# Altium PCB COMMS_ECU_revA.PcbDoc (part 6 of 6)
Units mm, origin at the board's own origin, x right, y up, seen from the top; angles counter-clockwise.
Board outline 370 x 261 mm, 6 copper layers (Top Layer, Mid Layer 1, Mid Layer 2, Mid Layer 3, Mid Layer 4, Bottom Layer), stack 1.538 mm thick; 739 components, 500 nets, 2454 pads, 325 vias.
Unrouted connection lines stored in the file: 1573.
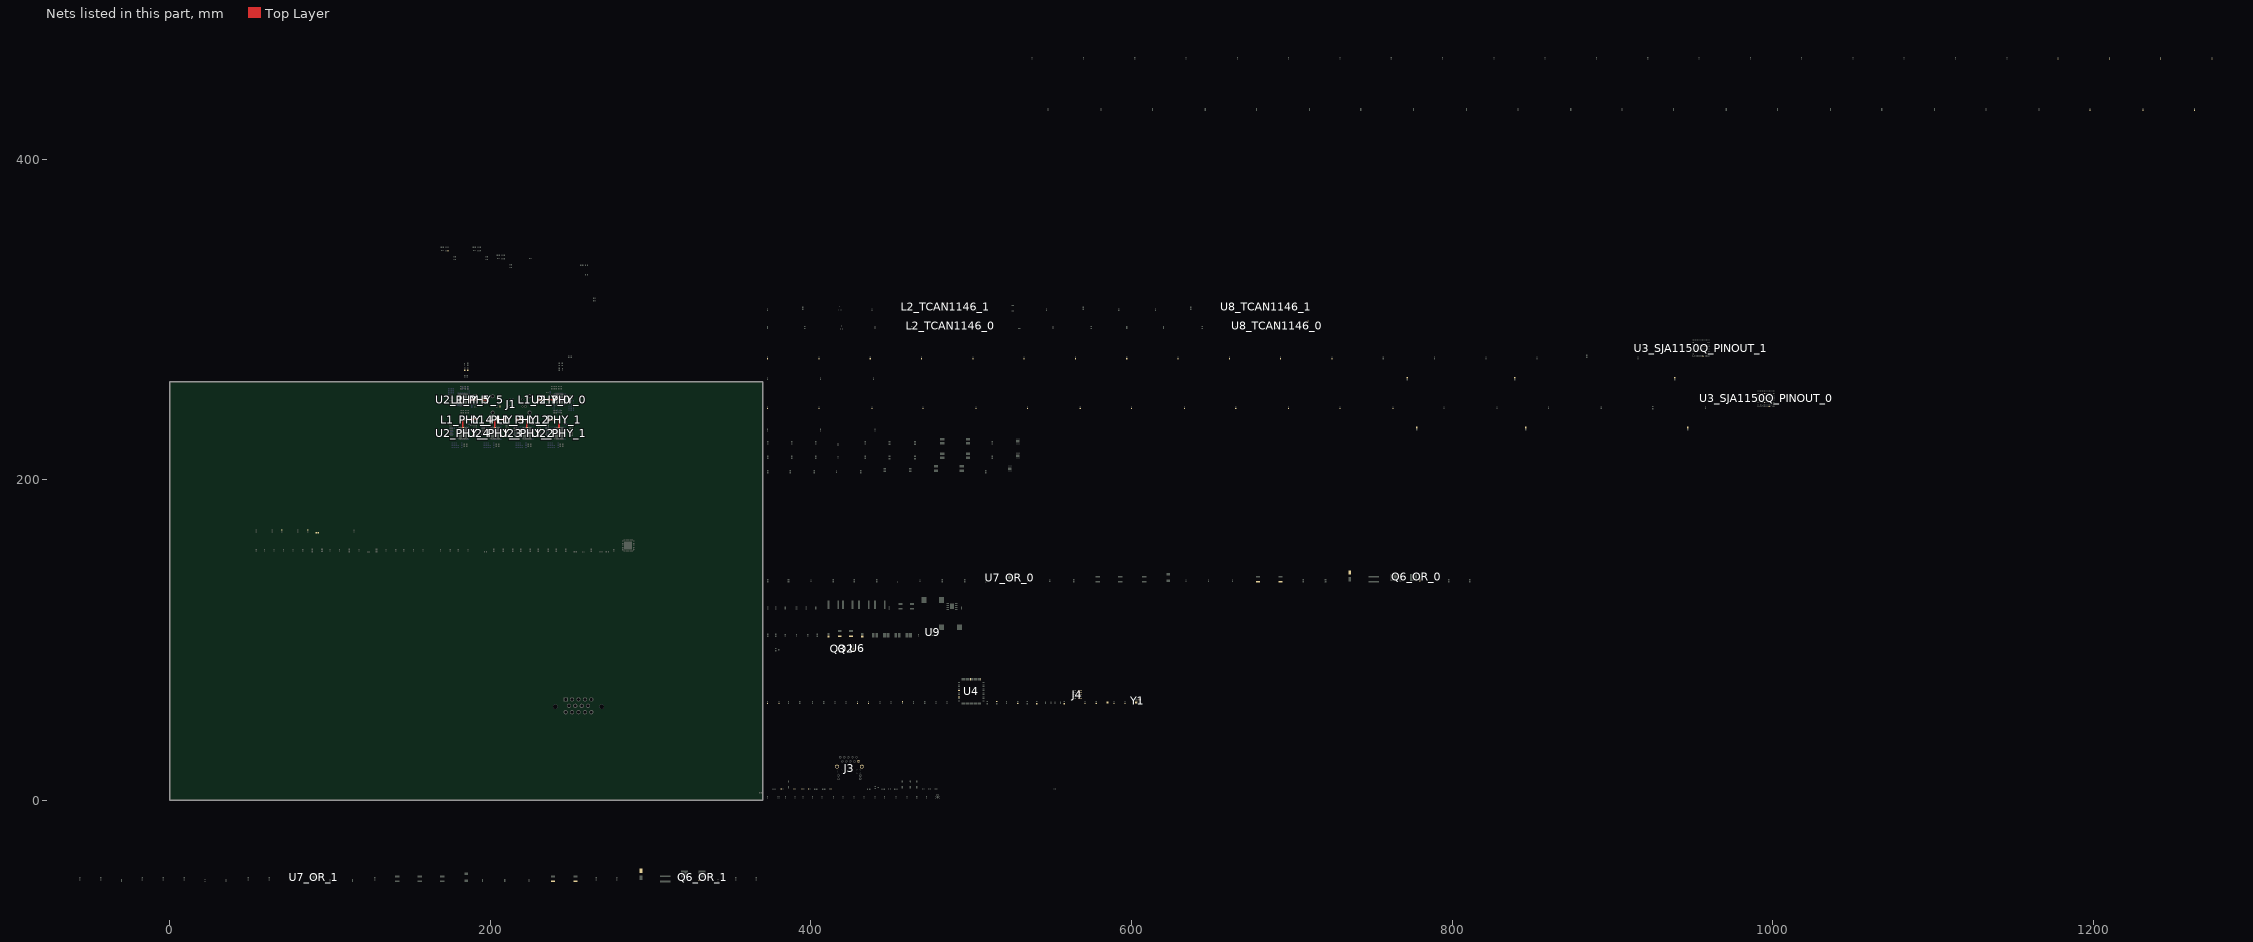
[diagram p5: the nets of this part, all layers, seen from the top]

## Via types
v1: diameter 0.5, hole 0.3, Top Layer to Bottom Layer, 319 vias
v2: diameter 0.66, hole 0.33, Top Layer to Bottom Layer, tented top, 6 vias

## Nets (pads, with @x,y where several pads share a name; then routed paths per layer and width w, separated by ;. In a path a pad name is that pad's centre, name@x,y a point inside that pad or via, vN(x,y) a via of type N, cw(c..) or ccw(c..) an arc to the next point about the centre after c; other vN are vias at no path point) (continued)
P4_TRX_P: C31_PHY_4.2 J1.3-1 R24_PHY_4.2 | length 2
  Top Layer w0.123: C31_PHY_4.2@190.229,238.25 190.25,238.25 190.525,237.975 190.525,237.734 190.597,237.662 191.489,237.662 191.703,237.875 v1(191.75,237.875)
P5_TRX_N: C32_PHY_5.2 J1.4-2 R23_PHY_5.2 | length 2
  Top Layer w0.123: C32_PHY_5.2@196.729,249.25 196.75,249.25 197.025,249.525 197.025,249.766 197.097,249.838 197.989,249.838 198.203,249.625 v1(198.25,249.625)
P5_TRX_P: C31_PHY_5.2 J1.4-1 R24_PHY_5.2 | length 2
  Top Layer w0.123: C31_PHY_5.2@196.729,250.75 196.75,250.75 197.025,250.475 197.025,250.234 197.097,250.162 197.989,250.162 198.203,250.375 v1(198.25,250.375)
PRE_CAN_TCAN1146_0_N: L2_TCAN1146_0.3 U8_TCAN1146_0.12
PRE_CAN_TCAN1146_0_P: L2_TCAN1146_0.2 U8_TCAN1146_0.13
PRE_CAN_TCAN1146_1_N: L2_TCAN1146_1.3 U8_TCAN1146_1.12
PRE_CAN_TCAN1146_1_P: L2_TCAN1146_1.2 U8_TCAN1146_1.13
PRE_VCC: C139_OR_0.2 C139_OR_1.2 C140_OR_0.1 C140_OR_1.1 C141_OR_0.1 C141_OR_1.1 D11_TCAN1146_0.2 D11_TCAN1146_1.2 Q2.1 Q2.2 Q2.3 Q3.1 Q3.2 Q3.3 Q6_OR_0.1-2-3 Q6_OR_1.1-2-3 R61.2 U7_OR_0.15 U7_OR_0.16 U7_OR_1.15 U7_OR_1.16
PWR_SW_GATE: Q2.4 Q3.4 R61.1 R64.2
RESETN: C115.1 J4.10 R48.1 R50.2 U4.14
RJ45_GND: C5.2 C6.1 C7.1 C8.1 C9.1 J3.P1 J3.S1 J3.S2
SW_VDD_CORE: C70_SJA1150Q_PINOUT_0.1 C70_SJA1150Q_PINOUT_1.1 C71_SJA1150Q_PINOUT_0.1 C71_SJA1150Q_PINOUT_1.1 C72_SJA1150Q_PINOUT_0.1 C72_SJA1150Q_PINOUT_1.1 C73_SJA1150Q_PINOUT_0.1 C73_SJA1150Q_PINOUT_1.1 C74_SJA1150Q_PINOUT_0.1 C74_SJA1150Q_PINOUT_1.1 C75_SJA1150Q_PINOUT_0.1 C75_SJA1150Q_PINOUT_1.1 C76_SJA1150Q_PINOUT_0.1 C76_SJA1150Q_PINOUT_1.1 C77_SJA1150Q_PINOUT_0.1 C77_SJA1150Q_PINOUT_1.1 C78_SJA1150Q_PINOUT_0.1 C78_SJA1150Q_PINOUT_1.1 C79_SJA1150Q_PINOUT_0.1 C79_SJA1150Q_PINOUT_1.1 FB13_SJA1150Q_PINOUT_0.2 FB13_SJA1150Q_PINOUT_1.2 U3_SJA1150Q_PINOUT_0.D6 U3_SJA1150Q_PINOUT_0.D9 U3_SJA1150Q_PINOUT_0.F4 U3_SJA1150Q_PINOUT_0.F11 U3_SJA1150Q_PINOUT_0.J4 U3_SJA1150Q_PINOUT_0.J11 U3_SJA1150Q_PINOUT_0.L6 U3_SJA1150Q_PINOUT_0.L9 U3_SJA1150Q_PINOUT_1.D6 U3_SJA1150Q_PINOUT_1.D9 U3_SJA1150Q_PINOUT_1.F4 U3_SJA1150Q_PINOUT_1.F11 U3_SJA1150Q_PINOUT_1.J4 U3_SJA1150Q_PINOUT_1.J11 U3_SJA1150Q_PINOUT_1.L6 U3_SJA1150Q_PINOUT_1.L9
SW_VDDA_OSC: C64_SJA1150Q_PINOUT_0.1 C64_SJA1150Q_PINOUT_1.1 C65_SJA1150Q_PINOUT_0.1 C65_SJA1150Q_PINOUT_1.1 C66_SJA1150Q_PINOUT_0.1 C66_SJA1150Q_PINOUT_1.1 FB16_SJA1150Q_PINOUT_0.2 FB16_SJA1150Q_PINOUT_1.2 U3_SJA1150Q_PINOUT_0.K1 U3_SJA1150Q_PINOUT_1.K1
SW_VDDA_PLL: C67_SJA1150Q_PINOUT_0.1 C67_SJA1150Q_PINOUT_1.1 C68_SJA1150Q_PINOUT_0.1 C68_SJA1150Q_PINOUT_1.1 C69_SJA1150Q_PINOUT_0.1 C69_SJA1150Q_PINOUT_1.1 FB19_SJA1150Q_PINOUT_0.2 FB19_SJA1150Q_PINOUT_1.2 U3_SJA1150Q_PINOUT_0.J1 U3_SJA1150Q_PINOUT_1.J1
SWCLK: J4.4 R46.1 U4.76
SWDIO: J4.2 U4.72
SWO: J4.6 U4.89
TRX_PHY_0_N: L1_PHY_0.2 U2_PHY_0.42 | length 4.3
  Top Layer w0.123: L1_PHY_0.2@235.525,250.5 235.75,250.5 235.988,250.262 235.988,250.234 236.061,250.162 239.177,250.162 239.266,250.25 U2_PHY_0.42@239.6,250.25
TRX_PHY_0_P: L1_PHY_0.1 U2_PHY_0.43 | length 4.3
  Top Layer w0.123: L1_PHY_0.1@235.525,249.5 235.75,249.5 235.988,249.738 235.988,249.766 236.061,249.838 239.177,249.838 239.266,249.75 U2_PHY_0.43@239.6,249.75
TRX_PHY_1_N: L1_PHY_1.2 U2_PHY_1.42 | length 6.4
  Top Layer w0.123: L1_PHY_1.2@242.025,238 242.25,238 242.488,237.762 242.488,237.734 242.561,237.662 242.869,237.662 243.162,237.369 243.162,232.823 243.25,232.734 U2_PHY_1.42@243.25,232.4
TRX_PHY_1_P: L1_PHY_1.1 U2_PHY_1.43 | length 5.9
  Top Layer w0.123: L1_PHY_1.1@242.025,237 242.25,237 242.488,237.238 242.488,237.266 242.561,237.338 242.735,237.338 242.838,237.235 242.838,232.823 242.75,232.734 U2_PHY_1.43@242.75,232.4
TRX_PHY_2_N: L1_PHY_2.2 U2_PHY_2.42 | length 6.4
  Top Layer w0.123: L1_PHY_2.2@222.025,238 222.25,238 222.488,237.762 222.488,237.734 222.561,237.662 222.869,237.662 223.162,237.369 223.162,232.823 223.25,232.734 U2_PHY_2.42@223.25,232.4
TRX_PHY_2_P: L1_PHY_2.1 U2_PHY_2.43 | length 5.9
  Top Layer w0.123: L1_PHY_2.1@222.025,237 222.25,237 222.488,237.238 222.488,237.266 222.561,237.338 222.735,237.338 222.838,237.235 222.838,232.823 222.75,232.734 U2_PHY_2.43@222.75,232.4
TRX_PHY_3_N: L1_PHY_3.2 U2_PHY_3.42 | length 5.9
  Top Layer w0.123: U2_PHY_3.42@203.25,232.4 203.25,232.734 203.162,232.823 203.162,237.235 203.265,237.338 203.439,237.338 203.512,237.266 203.512,237.238 203.75,237 L1_PHY_3.2@203.975,237
TRX_PHY_3_P: L1_PHY_3.1 U2_PHY_3.43 | length 6.4
  Top Layer w0.123: U2_PHY_3.43@202.75,232.4 202.75,232.734 202.838,232.823 202.838,237.369 203.131,237.662 203.439,237.662 203.512,237.734 203.512,237.762 203.75,238 L1_PHY_3.1@203.975,238
TRX_PHY_4_N: L1_PHY_4.2 U2_PHY_4.42 | length 5.9
  Top Layer w0.123: U2_PHY_4.42@183.25,232.4 183.25,232.734 183.162,232.823 183.162,237.235 183.265,237.338 183.439,237.338 183.512,237.266 183.512,237.238 183.75,237 L1_PHY_4.2@183.975,237
TRX_PHY_4_P: L1_PHY_4.1 U2_PHY_4.43 | length 6.4
  Top Layer w0.123: U2_PHY_4.43@182.75,232.4 182.75,232.734 182.838,232.823 182.838,237.369 183.131,237.662 183.439,237.662 183.512,237.734 183.512,237.762 183.75,238 L1_PHY_4.1@183.975,238
TRX_PHY_5_N: L1_PHY_5.2 U2_PHY_5.42 | length 4.3
  Top Layer w0.123: U2_PHY_5.42@186.4,249.75 186.734,249.75 186.823,249.838 189.939,249.838 190.012,249.766 190.012,249.738 190.25,249.5 L1_PHY_5.2@190.475,249.5
TRX_PHY_5_P: L1_PHY_5.1 U2_PHY_5.43 | length 4.3
  Top Layer w0.123: U2_PHY_5.43@186.4,250.25 186.734,250.25 186.823,250.162 189.939,250.162 190.012,250.234 190.012,250.262 190.25,250.5 L1_PHY_5.1@190.475,250.5
TRX_TERM_PHY_0_N: C32_PHY_0.1 L1_PHY_0.3 | length 2.8
  Top Layer w0.123: C32_PHY_0.1@230.229,250.75 230.479,250.5 230.479,250.234 230.551,250.162 231.449,250.162 231.939,250.162 232.012,250.234 232.012,250.262 232.25,250.5 L1_PHY_0.3@232.475,250.5
TRX_TERM_PHY_0_P: C31_PHY_0.1 L1_PHY_0.4 | length 2.8
  Top Layer w0.123: C31_PHY_0.1@230.229,249.25 230.479,249.5 230.479,249.766 230.551,249.838 231.315,249.838 231.939,249.838 232.012,249.766 232.012,249.738 232.25,249.5 L1_PHY_0.4@232.475,249.5
TRX_TERM_PHY_1_N: C32_PHY_1.1 L1_PHY_1.3 | length 2.8
  Top Layer w0.123: C32_PHY_1.1@236.729,238.25 236.979,238 236.979,237.734 237.051,237.662 238.439,237.662 238.512,237.734 238.512,237.762 238.75,238 L1_PHY_1.3@238.975,238
TRX_TERM_PHY_1_P: C31_PHY_1.1 L1_PHY_1.4 | length 2.8
  Top Layer w0.123: C31_PHY_1.1@236.729,236.75 236.979,237 236.979,237.266 237.051,237.338 238.439,237.338 238.512,237.266 238.512,237.238 238.75,237 L1_PHY_1.4@238.975,237
TRX_TERM_PHY_2_N: C32_PHY_2.1 L1_PHY_2.3 | length 2.8
  Top Layer w0.123: C32_PHY_2.1@216.729,238.25 216.979,238 216.979,237.734 217.051,237.662 218.439,237.662 218.512,237.734 218.512,237.762 218.75,238 L1_PHY_2.3@218.975,238
TRX_TERM_PHY_2_P: C31_PHY_2.1 L1_PHY_2.4 | length 2.8
  Top Layer w0.123: C31_PHY_2.1@216.729,236.75 216.979,237 216.979,237.266 217.051,237.338 218.439,237.338 218.512,237.266 218.512,237.238 218.75,237 L1_PHY_2.4@218.975,237
TRX_TERM_PHY_3_N: C32_PHY_3.1 L1_PHY_3.3 | length 2.8
  Top Layer w0.123: L1_PHY_3.3@207.025,237 207.25,237 207.488,237.238 207.488,237.266 207.561,237.338 208.949,237.338 209.021,237.266 209.021,237 C32_PHY_3.1@209.271,236.75
TRX_TERM_PHY_3_P: C31_PHY_3.1 L1_PHY_3.4 | length 2.8
  Top Layer w0.123: L1_PHY_3.4@207.025,238 207.25,238 207.488,237.762 207.488,237.734 207.561,237.662 208.949,237.662 209.021,237.734 209.021,238 C31_PHY_3.1@209.271,238.25
TRX_TERM_PHY_4_N: C32_PHY_4.1 L1_PHY_4.3 | length 2.8
  Top Layer w0.123: L1_PHY_4.3@187.025,237 187.25,237 187.488,237.238 187.488,237.266 187.561,237.338 188.949,237.338 189.021,237.266 189.021,237 C32_PHY_4.1@189.271,236.75
TRX_TERM_PHY_4_P: C31_PHY_4.1 L1_PHY_4.4 | length 2.8
  Top Layer w0.123: L1_PHY_4.4@187.025,238 187.25,238 187.488,237.762 187.488,237.734 187.561,237.662 188.949,237.662 189.021,237.734 189.021,238 C31_PHY_4.1@189.271,238.25
TRX_TERM_PHY_5_N: C32_PHY_5.1 L1_PHY_5.3 | length 2.8
  Top Layer w0.123: L1_PHY_5.3@193.525,249.5 193.75,249.5 193.988,249.738 193.988,249.766 194.061,249.838 194.551,249.838 195.449,249.838 195.521,249.766 195.521,249.5 C32_PHY_5.1@195.771,249.25
TRX_TERM_PHY_5_P: C31_PHY_5.1 L1_PHY_5.4 | length 2.8
  Top Layer w0.123: L1_PHY_5.4@193.525,250.5 193.75,250.5 193.988,250.262 193.988,250.234 194.061,250.162 194.685,250.162 195.449,250.162 195.521,250.234 195.521,250.5 C31_PHY_5.1@195.771,250.75
VCC: C164.1 C165.1 C166.1 C167.1 R62.2 U6.3 U6.4 U9.2 U9.13 U9.14
VDDA: C122.1 C123.1 C130.1 C131.1 FB23.2 U4.20 U4.21
X32_N: C113.1 U4.9 Y2.2
X32_P: C112.1 U4.8 Y2.1
X_N: C110.1 U4.13 Y1.1
X_P: C111.1 U4.12 Y1.3
pads on no net: D5.2 J2. J3. J4.7 J4.8 J4.9 U1.14 U1.42 U1.44 U1.45 U2_PHY_0.2 U2_PHY_0.7 U2_PHY_0.38 U2_PHY_0.40 U2_PHY_1.2 U2_PHY_1.7 U2_PHY_1.38 U2_PHY_1.40 U2_PHY_2.2 U2_PHY_2.7 U2_PHY_2.38 U2_PHY_2.40 U2_PHY_3.2 U2_PHY_3.7 U2_PHY_3.38 U2_PHY_3.40 U2_PHY_4.2 U2_PHY_4.7 U2_PHY_4.38 U2_PHY_4.40 U2_PHY_5.2 U2_PHY_5.7 U2_PHY_5.38 U2_PHY_5.40 U3_SJA1150Q_PINOUT_0.A3 U3_SJA1150Q_PINOUT_0.A10 U3_SJA1150Q_PINOUT_0.F14 U3_SJA1150Q_PINOUT_0.H1 U3_SJA1150Q_PINOUT_0.L1 U3_SJA1150Q_PINOUT_0.M1 U3_SJA1150Q_PINOUT_0.M2 U3_SJA1150Q_PINOUT_0.N1 U3_SJA1150Q_PINOUT_0.N3 U3_SJA1150Q_PINOUT_0.N14 U3_SJA1150Q_PINOUT_0.P2 U3_SJA1150Q_PINOUT_0.P6 U3_SJA1150Q_PINOUT_1.A3 U3_SJA1150Q_PINOUT_1.A10 U3_SJA1150Q_PINOUT_1.F14 U3_SJA1150Q_PINOUT_1.H1 U3_SJA1150Q_PINOUT_1.L1 U3_SJA1150Q_PINOUT_1.M1 U3_SJA1150Q_PINOUT_1.M2 U3_SJA1150Q_PINOUT_1.N1 U3_SJA1150Q_PINOUT_1.N3 U3_SJA1150Q_PINOUT_1.N14 U3_SJA1150Q_PINOUT_1.P2 U3_SJA1150Q_PINOUT_1.P6 U5.19 U6.6 U7_OR_0.8 U7_OR_0.17 U7_OR_0.21 U7_OR_0.25 U7_OR_1.8 U7_OR_1.17 U7_OR_1.21 U7_OR_1.25 U9.10 U10_REG_1.5 U10_REG_2.5 U10_REG_3.5
copper on no net: | length 2
  Top Layer w0.123: 210.229,236.75 210.25,236.75 210.525,237.025 210.525,237.266 210.597,237.338 211.489,237.338 211.703,237.125 v1(211.75,237.125)
  other v1: 191.75,236.375 211.75,236.375 214.25,236.375 234.25,236.375 191.75,238.625 211.75,238.625 214.25,238.625 234.25,238.625 198.25,248.875 227.75,248.875 198.25,251.125 227.75,251.125

## Polygon pours and split planes (outlines as drawn)
LAN8870_VDDA_PHY_2 on Top Layer "LAN8870_VDDA_PHY_2_L01_P073" (solid, remove dead copper, pour order 73): 220.5,232 220.5,232.75 220,233.25 220,234.25 219.5,234.25 219.5,232
3V3 on Top Layer "3V3_L01_P143" (solid, remove dead copper, pour order 143): 246,247 248.25,247 248.25,247.5 246,247.5
NetC36_PHY_0_1 on Top Layer "NETC36_PHY_0_1_L01_P131" (solid, remove dead copper, pour order 131): 243.75,247 243.75,244.75 244.5,244.75 244.5,247
NetC42_PHY_0_1 on Top Layer "NETC42_PHY_0_1_L01_P125" (solid, remove dead copper, pour order 125): 242,247 242,244.75 242.5,244.75 242.5,247
LAN8870_VBAT_PHY_0 on Top Layer "LAN8870_VBAT_PHY_0_L01_P119" (solid, remove dead copper, pour order 119): 240,247 240,244.75 240.5,244.75 240.5,247
3V3 on Top Layer "3V3_L01_P113" (solid, remove dead copper, pour order 113): 246,251.25 247.5,251.25 247.75,251.5 248.25,251.5 248.25,250.5 246,250.5
8870_1V1 on Top Layer "8870_1V1_L01_P107" (solid, remove dead copper, pour order 107): 248.25,252.25 246,252.25 246,252 246,251.5 248.25,251.5
8870_1V1 on Top Layer "8870_1V1_L01_P101" (solid, remove dead copper, pour order 101): 246,250 248.25,250 248.25,250.5 246,250.5
8870_1V1 on Top Layer "8870_1V1_L01_P095" (solid, remove dead copper, pour order 95): 244,253 244,255.25 243.5,255.25 243.5,253
3V3 on Top Layer "3V3_L01_P089" (solid, remove dead copper, pour order 89): 240.5,253 240.5,255.25 240,255.25 240,253
LAN8870_VDDA_PHY_0 on Top Layer "LAN8870_VDDA_PHY_0_L01_P083" (solid, remove dead copper, pour order 83): 240,253 237.75,253 237.75,252.5 240,252.5
LAN8870_VDDA_PHY_0 on Top Layer "LAN8870_VDDA_PHY_0_L01_P077" (solid, remove dead copper, pour order 77): 240,251 237.75,251 237.75,250.5 240,250.5
LAN8870_VDDA_PHY_0 on Top Layer "LAN8870_VDDA_PHY_0_L01_P071" (solid, remove dead copper, pour order 71): 240,247.5 239.25,247.5 238.75,247 237.75,247 237.75,246.5 240,246.5
NetC42_PHY_0_1 on Top Layer "NETC42_PHY_0_1_L01_P065" (solid, remove dead copper, pour order 65): 240,248.5 238.5,248.5 238.25,248.25 237.75,248.25 237.75,247.5 238.25,247.5 238.75,248 240,248
LAN8870_VDDA_PHY_0 on Top Layer "LAN8870_VDDA_PHY_0_L01_P059" (solid, remove dead copper, pour order 59): 240,249 237.75,249 237.75,248.25 238.25,248.25 238.5,248.5 240,248.5
NetC42_PHY_0_1 on Top Layer "NETC42_PHY_0_1_L01_P053" (solid, remove dead copper, pour order 53): 240,249.5 237.75,249.5 237.75,249 240,249
8870_1V1 on Top Layer "8870_1V1_L01_P137" (solid, remove dead copper, pour order 137): 245.25,247 245.25,244.75 244.5,244.75 244.5,247
NetC42_PHY_4_1 on Top Layer "NETC42_PHY_4_1_L01_P054" (solid, remove dead copper, pour order 54): 182.5,232 182.5,234.25 182,234.25 182,232
NetC42_PHY_3_1 on Top Layer "NETC42_PHY_3_1_L01_P054" (solid, remove dead copper, pour order 54): 202.5,232 202.5,234.25 202,234.25 202,232
NetC42_PHY_1_1 on Top Layer "NETC42_PHY_1_1_L01_P055" (solid, remove dead copper, pour order 55): 242.5,232 242.5,234.25 242,234.25 242,232
NetC42_PHY_2_1 on Top Layer "NETC42_PHY_2_1_L01_P055" (solid, remove dead copper, pour order 55): 222.5,232 222.5,234.25 222,234.25 222,232
LAN8870_VDDA_PHY_4 on Top Layer "LAN8870_VDDA_PHY_4_L01_P060" (solid, remove dead copper, pour order 60): 182,232 182,234.25 181.25,234.25 181.25,233.75 181.5,233.5 181.5,232
LAN8870_VDDA_PHY_3 on Top Layer "LAN8870_VDDA_PHY_3_L01_P060" (solid, remove dead copper, pour order 60): 202,232 202,234.25 201.25,234.25 201.25,233.75 201.5,233.5 201.5,232
LAN8870_VDDA_PHY_1 on Top Layer "LAN8870_VDDA_PHY_1_L01_P061" (solid, remove dead copper, pour order 61): 242,232 242,234.25 241.25,234.25 241.25,233.75 241.5,233.5 241.5,232
LAN8870_VDDA_PHY_2 on Top Layer "LAN8870_VDDA_PHY_2_L01_P061" (solid, remove dead copper, pour order 61): 222,232 222,234.25 221.25,234.25 221.25,233.75 221.5,233.5 221.5,232
NetC42_PHY_4_1 on Top Layer "NETC42_PHY_4_1_L01_P066" (solid, remove dead copper, pour order 66): 181.5,232 181.5,233.5 181.25,233.75 181.25,234.25 180.5,234.25 180.5,233.75 181,233.25 181,232
NetC42_PHY_3_1 on Top Layer "NETC42_PHY_3_1_L01_P066" (solid, remove dead copper, pour order 66): 201.5,232 201.5,233.5 201.25,233.75 201.25,234.25 200.5,234.25 200.5,233.75 201,233.25 201,232
NetC42_PHY_1_1 on Top Layer "NETC42_PHY_1_1_L01_P067" (solid, remove dead copper, pour order 67): 241.5,232 241.5,233.5 241.25,233.75 241.25,234.25 240.5,234.25 240.5,233.75 241,233.25 241,232
NetC42_PHY_2_1 on Top Layer "NETC42_PHY_2_1_L01_P067" (solid, remove dead copper, pour order 67): 221.5,232 221.5,233.5 221.25,233.75 221.25,234.25 220.5,234.25 220.5,233.75 221,233.25 221,232
LAN8870_VDDA_PHY_4 on Top Layer "LAN8870_VDDA_PHY_4_L01_P072" (solid, remove dead copper, pour order 72): 180.5,232 180.5,232.75 180,233.25 180,234.25 179.5,234.25 179.5,232
LAN8870_VDDA_PHY_3 on Top Layer "LAN8870_VDDA_PHY_3_L01_P072" (solid, remove dead copper, pour order 72): 200.5,232 200.5,232.75 200,233.25 200,234.25 199.5,234.25 199.5,232
LAN8870_VDDA_PHY_1 on Top Layer "LAN8870_VDDA_PHY_1_L01_P073" (solid, remove dead copper, pour order 73): 240.5,232 240.5,232.75 240,233.25 240,234.25 239.5,234.25 239.5,232
LAN8870_VDDA_PHY_3 on Top Layer "LAN8870_VDDA_PHY_3_L01_P078" (solid, remove dead copper, pour order 78): 204,232 204,234.25 203.5,234.25 203.5,232
LAN8870_VDDA_PHY_4 on Top Layer "LAN8870_VDDA_PHY_4_L01_P078" (solid, remove dead copper, pour order 78): 184,232 184,234.25 183.5,234.25 183.5,232
LAN8870_VDDA_PHY_1 on Top Layer "LAN8870_VDDA_PHY_1_L01_P079" (solid, remove dead copper, pour order 79): 244,232 244,234.25 243.5,234.25 243.5,232
LAN8870_VDDA_PHY_2 on Top Layer "LAN8870_VDDA_PHY_2_L01_P079" (solid, remove dead copper, pour order 79): 224,232 224,234.25 223.5,234.25 223.5,232
LAN8870_VDDA_PHY_4 on Top Layer "LAN8870_VDDA_PHY_4_L01_P084" (solid, remove dead copper, pour order 84): 186,232 186,234.25 185.5,234.25 185.5,232
LAN8870_VDDA_PHY_3 on Top Layer "LAN8870_VDDA_PHY_3_L01_P084" (solid, remove dead copper, pour order 84): 206,232 206,234.25 205.5,234.25 205.5,232
LAN8870_VDDA_PHY_2 on Top Layer "LAN8870_VDDA_PHY_2_L01_P085" (solid, remove dead copper, pour order 85): 226,232 226,234.25 225.5,234.25 225.5,232
LAN8870_VDDA_PHY_1 on Top Layer "LAN8870_VDDA_PHY_1_L01_P085" (solid, remove dead copper, pour order 85): 246,232 246,234.25 245.5,234.25 245.5,232
3V3 on Top Layer "3V3_L01_P090" (solid, remove dead copper, pour order 90): 186,231.5 188.25,231.5 188.25,232 186,232
3V3 on Top Layer "3V3_L01_P090" (solid, remove dead copper, pour order 90): 206,231.5 208.25,231.5 208.25,232 206,232
3V3 on Top Layer "3V3_L01_P091" (solid, remove dead copper, pour order 91): 246,231.5 248.25,231.5 248.25,232 246,232
3V3 on Top Layer "3V3_L01_P091" (solid, remove dead copper, pour order 91): 226,231.5 228.25,231.5 228.25,232 226,232
8870_1V1 on Top Layer "8870_1V1_L01_P096" (solid, remove dead copper, pour order 96): 186,228 188.25,228 188.25,228.5 186,228.5
8870_1V1 on Top Layer "8870_1V1_L01_P096" (solid, remove dead copper, pour order 96): 206,228 208.25,228 208.25,228.5 206,228.5
8870_1V1 on Top Layer "8870_1V1_L01_P097" (solid, remove dead copper, pour order 97): 226,228 228.25,228 228.25,228.5 226,228.5
8870_1V1 on Top Layer "8870_1V1_L01_P097" (solid, remove dead copper, pour order 97): 246,228 248.25,228 248.25,228.5 246,228.5
8870_1V1 on Top Layer "8870_1V1_L01_P102" (solid, remove dead copper, pour order 102): 203,226 203,223.75 203.5,223.75 203.5,226
8870_1V1 on Top Layer "8870_1V1_L01_P102" (solid, remove dead copper, pour order 102): 183,226 183,223.75 183.5,223.75 183.5,226
8870_1V1 on Top Layer "8870_1V1_L01_P103" (solid, remove dead copper, pour order 103): 243,226 243,223.75 243.5,223.75 243.5,226
8870_1V1 on Top Layer "8870_1V1_L01_P103" (solid, remove dead copper, pour order 103): 223,226 223,223.75 223.5,223.75 223.5,226
8870_1V1 on Top Layer "8870_1V1_L01_P108" (solid, remove dead copper, pour order 108): 205.25,223.75 205.25,226 205,226 204.5,226 204.5,223.75
8870_1V1 on Top Layer "8870_1V1_L01_P108" (solid, remove dead copper, pour order 108): 185.25,223.75 185.25,226 185,226 184.5,226 184.5,223.75
8870_1V1 on Top Layer "8870_1V1_L01_P109" (solid, remove dead copper, pour order 109): 245.25,223.75 245.25,226 245,226 244.5,226 244.5,223.75
8870_1V1 on Top Layer "8870_1V1_L01_P109" (solid, remove dead copper, pour order 109): 225.25,223.75 225.25,226 225,226 224.5,226 224.5,223.75
3V3 on Top Layer "3V3_L01_P114" (solid, remove dead copper, pour order 114): 184.25,226 184.25,224.5 184.5,224.25 184.5,223.75 183.5,223.75 183.5,226
3V3 on Top Layer "3V3_L01_P114" (solid, remove dead copper, pour order 114): 204.25,226 204.25,224.5 204.5,224.25 204.5,223.75 203.5,223.75 203.5,226
3V3 on Top Layer "3V3_L01_P115" (solid, remove dead copper, pour order 115): 224.25,226 224.25,224.5 224.5,224.25 224.5,223.75 223.5,223.75 223.5,226
3V3 on Top Layer "3V3_L01_P115" (solid, remove dead copper, pour order 115): 244.25,226 244.25,224.5 244.5,224.25 244.5,223.75 243.5,223.75 243.5,226
LAN8870_VBAT_PHY_3 on Top Layer "LAN8870_VBAT_PHY_3_L01_P120" (solid, remove dead copper, pour order 120): 200,232 197.75,232 197.75,231.5 200,231.5
LAN8870_VBAT_PHY_4 on Top Layer "LAN8870_VBAT_PHY_4_L01_P120" (solid, remove dead copper, pour order 120): 180,232 177.75,232 177.75,231.5 180,231.5
LAN8870_VBAT_PHY_2 on Top Layer "LAN8870_VBAT_PHY_2_L01_P121" (solid, remove dead copper, pour order 121): 220,232 217.75,232 217.75,231.5 220,231.5
LAN8870_VBAT_PHY_1 on Top Layer "LAN8870_VBAT_PHY_1_L01_P121" (solid, remove dead copper, pour order 121): 240,232 237.75,232 237.75,231.5 240,231.5
NetC42_PHY_4_1 on Top Layer "NETC42_PHY_4_1_L01_P126" (solid, remove dead copper, pour order 126): 180,230 177.75,230 177.75,229.5 180,229.5
NetC42_PHY_3_1 on Top Layer "NETC42_PHY_3_1_L01_P126" (solid, remove dead copper, pour order 126): 200,230 197.75,230 197.75,229.5 200,229.5
NetC42_PHY_2_1 on Top Layer "NETC42_PHY_2_1_L01_P127" (solid, remove dead copper, pour order 127): 220,230 217.75,230 217.75,229.5 220,229.5
NetC42_PHY_1_1 on Top Layer "NETC42_PHY_1_1_L01_P127" (solid, remove dead copper, pour order 127): 240,230 237.75,230 237.75,229.5 240,229.5
NetC36_PHY_3_1 on Top Layer "NETC36_PHY_3_1_L01_P132" (solid, remove dead copper, pour order 132): 200,228.25 197.75,228.25 197.75,227.5 200,227.5
NetC36_PHY_4_1 on Top Layer "NETC36_PHY_4_1_L01_P132" (solid, remove dead copper, pour order 132): 180,228.25 177.75,228.25 177.75,227.5 180,227.5
NetC36_PHY_2_1 on Top Layer "NETC36_PHY_2_1_L01_P133" (solid, remove dead copper, pour order 133): 220,228.25 217.75,228.25 217.75,227.5 220,227.5
NetC36_PHY_1_1 on Top Layer "NETC36_PHY_1_1_L01_P133" (solid, remove dead copper, pour order 133): 240,228.25 237.75,228.25 237.75,227.5 240,227.5
8870_1V1 on Top Layer "8870_1V1_L01_P138" (solid, remove dead copper, pour order 138): 200,226.75 197.75,226.75 197.75,227.5 200,227.5
8870_1V1 on Top Layer "8870_1V1_L01_P138" (solid, remove dead copper, pour order 138): 180,226.75 177.75,226.75 177.75,227.5 180,227.5
8870_1V1 on Top Layer "8870_1V1_L01_P139" (solid, remove dead copper, pour order 139): 240,226.75 237.75,226.75 237.75,227.5 240,227.5
8870_1V1 on Top Layer "8870_1V1_L01_P139" (solid, remove dead copper, pour order 139): 220,226.75 217.75,226.75 217.75,227.5 220,227.5
3V3 on Top Layer "3V3_L01_P144" (solid, remove dead copper, pour order 144): 180,226 180,223.75 180.5,223.75 180.5,226
3V3 on Top Layer "3V3_L01_P144" (solid, remove dead copper, pour order 144): 200,226 200,223.75 200.5,223.75 200.5,226
3V3 on Top Layer "3V3_L01_P145" (solid, remove dead copper, pour order 145): 240,226 240,223.75 240.5,223.75 240.5,226
3V3 on Top Layer "3V3_L01_P145" (solid, remove dead copper, pour order 145): 220,226 220,223.75 220.5,223.75 220.5,226
8870_1V1 on Top Layer "8870_1V1_L01_P135" (solid, remove dead copper, pour order 135): 180.75,253 180.75,255.25 181.5,255.25 181.5,253
NetC42_PHY_5_1 on Top Layer "NETC42_PHY_5_1_L01_P051" (solid, remove dead copper, pour order 51): 186,250.5 188.25,250.5 188.25,251 186,251
LAN8870_VDDA_PHY_5 on Top Layer "LAN8870_VDDA_PHY_5_L01_P057" (solid, remove dead copper, pour order 57): 186,251 188.25,251 188.25,251.75 187.75,251.75 187.5,251.5 186,251.5
NetC42_PHY_5_1 on Top Layer "NETC42_PHY_5_1_L01_P063" (solid, remove dead copper, pour order 63): 186,251.5 187.5,251.5 187.75,251.75 188.25,251.75 188.25,252.5 187.75,252.5 187.25,252 186,252
LAN8870_VDDA_PHY_5 on Top Layer "LAN8870_VDDA_PHY_5_L01_P069" (solid, remove dead copper, pour order 69): 186,252.5 186.75,252.5 187.25,253 188.25,253 188.25,253.5 186,253.5
LAN8870_VDDA_PHY_5 on Top Layer "LAN8870_VDDA_PHY_5_L01_P075" (solid, remove dead copper, pour order 75): 186,249 188.25,249 188.25,249.5 186,249.5
LAN8870_VDDA_PHY_5 on Top Layer "LAN8870_VDDA_PHY_5_L01_P081" (solid, remove dead copper, pour order 81): 186,247 188.25,247 188.25,247.5 186,247.5
3V3 on Top Layer "3V3_L01_P087" (solid, remove dead copper, pour order 87): 185.5,247 185.5,244.75 186,244.75 186,247
8870_1V1 on Top Layer "8870_1V1_L01_P093" (solid, remove dead copper, pour order 93): 182,247 182,244.75 182.5,244.75 182.5,247
8870_1V1 on Top Layer "8870_1V1_L01_P099" (solid, remove dead copper, pour order 99): 180,250 177.75,250 177.75,249.5 180,249.5
8870_1V1 on Top Layer "8870_1V1_L01_P105" (solid, remove dead copper, pour order 105): 177.75,247.75 180,247.75 180,248 180,248.5 177.75,248.5
3V3 on Top Layer "3V3_L01_P111" (solid, remove dead copper, pour order 111): 180,248.75 178.5,248.75 178.25,248.5 177.75,248.5 177.75,249.5 180,249.5
LAN8870_VBAT_PHY_5 on Top Layer "LAN8870_VBAT_PHY_5_L01_P117" (solid, remove dead copper, pour order 117): 186,253 186,255.25 185.5,255.25 185.5,253
NetC42_PHY_5_1 on Top Layer "NETC42_PHY_5_1_L01_P123" (solid, remove dead copper, pour order 123): 184,253 184,255.25 183.5,255.25 183.5,253
NetC36_PHY_5_1 on Top Layer "NETC36_PHY_5_1_L01_P129" (solid, remove dead copper, pour order 129): 182.25,253 182.25,255.25 181.5,255.25 181.5,253
3V3 on Top Layer "3V3_L01_P141" (solid, remove dead copper, pour order 141): 180,253 177.75,253 177.75,252.5 180,252.5
LAN8870_VDDA_PHY_0 on Bottom Layer "LAN8870_VDDA_PHY_0_L06_P239" (solid, remove dead copper, pour order 239): 239.5,251.5 239.5,254 236.75,254 236.75,251.5
LAN8870_VDDA_PHY_0 on Bottom Layer "LAN8870_VDDA_PHY_0_L06_P233" (solid, remove dead copper, pour order 233): 239.5,250.25 239.5,251.5 237.5,251.5 237.5,250.25
NetC42_PHY_0_1 on Bottom Layer "NETC42_PHY_0_1_L06_P227" (solid, remove dead copper, pour order 227): 239.5,249 239.5,250.25 237.5,250.25 237.5,249
LAN8870_VDDA_PHY_0 on Bottom Layer "LAN8870_VDDA_PHY_0_L06_P221" (solid, remove dead copper, pour order 221): 238.25,248 238.5,247.75 239.5,247.75 239.5,249 237.5,249 237.5,248
NetC42_PHY_0_1 on Bottom Layer "NETC42_PHY_0_1_L06_P215" (solid, remove dead copper, pour order 215): 239.5,246.75 239.5,247.75 238.5,247.75 238.25,248 237.5,248 237.5,247 238.25,247 238.5,246.75
LAN8870_VDDA_PHY_0 on Bottom Layer "LAN8870_VDDA_PHY_0_L06_P209" (solid, remove dead copper, pour order 209): 237.5,247 237.5,246.5 238.5,245.5 239.5,245.5 239.5,246.75 238.5,246.75 238.25,247
LAN8870_VBAT_PHY_0 on Bottom Layer "LAN8870_VBAT_PHY_0_L06_P203" (solid, remove dead copper, pour order 203): 241.75,246.5 240.5,246.5 240.5,245.5 239.5,245.5 239.5,242.75 241,242.75 241,244.5 241.75,244.5
NetC42_PHY_0_1 on Bottom Layer "NETC42_PHY_0_1_L06_P197" (solid, remove dead copper, pour order 197): 241.75,246.5 243,246.5 243,242.75 241,242.75 241,244.5 241.75,244.5
8870_1V1 on Bottom Layer "8870_1V1_L06_P191" (solid, remove dead copper, pour order 191): 245.25,246.5 246.5,246.5 246.5,244.5 244.5,244.5 244.5,245.5 245.25,245.5
NetC36_PHY_0_1 on Bottom Layer "NETC36_PHY_0_1_L06_P185" (solid, remove dead copper, pour order 185): 244.5,242.75 244.5,245.5 245.25,245.5 245.25,246.5 243,246.5 243,242.75
3V3 on Bottom Layer "3V3_L06_P179" (solid, remove dead copper, pour order 179): 246.5,249.25 248.5,249.25 248.5,247 247.75,247 246.75,248 246.5,248
8870_1V1 on Bottom Layer "8870_1V1_L06_P173" (solid, remove dead copper, pour order 173): 246.5,250.5 248.5,250.5 248.5,249.25 246.5,249.25
3V3 on Bottom Layer "3V3_L06_P167" (solid, remove dead copper, pour order 167): 248.5,251.5 246.5,251.5 246.5,250.5 248.5,250.5
8870_1V1 on Bottom Layer "8870_1V1_L06_P161" (solid, remove dead copper, pour order 161): 246.5,254 248.5,254 248.5,251.5 246.5,251.5
8870_1V1 on Bottom Layer "8870_1V1_L06_P155" (solid, remove dead copper, pour order 155): 243,253.5 243,255.5 245.25,255.5 245.25,253.5
3V3 on Bottom Layer "3V3_L06_P149" (solid, remove dead copper, pour order 149): 240.5,253.5 240.5,254 239.75,254 239.75,255.5 242.75,255.5 242.75,253.5
LAN8870_VDDA_PHY_1 on Bottom Layer "LAN8870_VDDA_PHY_1_L06_P241" (solid, remove dead copper, pour order 241): 244.5,232.5 247,232.5 247,235.25 244.5,235.25
LAN8870_VDDA_PHY_1 on Bottom Layer "LAN8870_VDDA_PHY_1_L06_P235" (solid, remove dead copper, pour order 235): 243.25,232.5 244.5,232.5 244.5,234.5 243.25,234.5
NetC42_PHY_1_1 on Bottom Layer "NETC42_PHY_1_1_L06_P229" (solid, remove dead copper, pour order 229): 242,232.5 243.25,232.5 243.25,234.5 242,234.5
LAN8870_VDDA_PHY_1 on Bottom Layer "LAN8870_VDDA_PHY_1_L06_P223" (solid, remove dead copper, pour order 223): 241,233.75 240.75,233.5 240.75,232.5 242,232.5 242,234.5 241,234.5
NetC42_PHY_1_1 on Bottom Layer "NETC42_PHY_1_1_L06_P217" (solid, remove dead copper, pour order 217): 239.75,232.5 240.75,232.5 240.75,233.5 241,233.75 241,234.5 240,234.5 240,233.75 239.75,233.5
LAN8870_VDDA_PHY_1 on Bottom Layer "LAN8870_VDDA_PHY_1_L06_P211" (solid, remove dead copper, pour order 211): 240,234.5 239.5,234.5 238.5,233.5 238.5,232.5 239.75,232.5 239.75,233.5 240,233.75
LAN8870_VBAT_PHY_1 on Bottom Layer "LAN8870_VBAT_PHY_1_L06_P205" (solid, remove dead copper, pour order 205): 239.5,230.25 239.5,231.5 238.5,231.5 238.5,232.5 235.75,232.5 235.75,231 237.5,231 237.5,230.25
NetC42_PHY_1_1 on Bottom Layer "NETC42_PHY_1_1_L06_P199" (solid, remove dead copper, pour order 199): 239.5,230.25 239.5,229 235.75,229 235.75,231 237.5,231 237.5,230.25
8870_1V1 on Bottom Layer "8870_1V1_L06_P193" (solid, remove dead copper, pour order 193): 239.5,226.75 239.5,225.5 237.5,225.5 237.5,227.5 238.5,227.5 238.5,226.75
NetC36_PHY_1_1 on Bottom Layer "NETC36_PHY_1_1_L06_P187" (solid, remove dead copper, pour order 187): 235.75,227.5 238.5,227.5 238.5,226.75 239.5,226.75 239.5,229 235.75,229
3V3 on Bottom Layer "3V3_L06_P181" (solid, remove dead copper, pour order 181): 242.25,225.5 242.25,223.5 240,223.5 240,224.25 241,225.25 241,225.5
8870_1V1 on Bottom Layer "8870_1V1_L06_P175" (solid, remove dead copper, pour order 175): 243.5,225.5 243.5,223.5 242.25,223.5 242.25,225.5
3V3 on Bottom Layer "3V3_L06_P169" (solid, remove dead copper, pour order 169): 244.5,223.5 244.5,225.5 243.5,225.5 243.5,223.5
8870_1V1 on Bottom Layer "8870_1V1_L06_P163" (solid, remove dead copper, pour order 163): 247,225.5 247,223.5 244.5,223.5 244.5,225.5
8870_1V1 on Bottom Layer "8870_1V1_L06_P157" (solid, remove dead copper, pour order 157): 246.5,229 248.5,229 248.5,226.75 246.5,226.75
3V3 on Bottom Layer "3V3_L06_P151" (solid, remove dead copper, pour order 151): 246.5,231.5 247,231.5 247,232.25 248.5,232.25 248.5,229.25 246.5,229.25
LAN8870_VDDA_PHY_4 on Bottom Layer "LAN8870_VDDA_PHY_4_L06_P240" (solid, remove dead copper, pour order 240): 184.5,232.5 187,232.5 187,235.25 184.5,235.25
LAN8870_VDDA_PHY_4 on Bottom Layer "LAN8870_VDDA_PHY_4_L06_P234" (solid, remove dead copper, pour order 234): 183.25,232.5 184.5,232.5 184.5,234.5 183.25,234.5
NetC42_PHY_4_1 on Bottom Layer "NETC42_PHY_4_1_L06_P228" (solid, remove dead copper, pour order 228): 182,232.5 183.25,232.5 183.25,234.5 182,234.5
LAN8870_VDDA_PHY_4 on Bottom Layer "LAN8870_VDDA_PHY_4_L06_P222" (solid, remove dead copper, pour order 222): 181,233.75 180.75,233.5 180.75,232.5 182,232.5 182,234.5 181,234.5
NetC42_PHY_4_1 on Bottom Layer "NETC42_PHY_4_1_L06_P216" (solid, remove dead copper, pour order 216): 179.75,232.5 180.75,232.5 180.75,233.5 181,233.75 181,234.5 180,234.5 180,233.75 179.75,233.5
LAN8870_VDDA_PHY_4 on Bottom Layer "LAN8870_VDDA_PHY_4_L06_P210" (solid, remove dead copper, pour order 210): 180,234.5 179.5,234.5 178.5,233.5 178.5,232.5 179.75,232.5 179.75,233.5 180,233.75
LAN8870_VBAT_PHY_4 on Bottom Layer "LAN8870_VBAT_PHY_4_L06_P204" (solid, remove dead copper, pour order 204): 179.5,230.25 179.5,231.5 178.5,231.5 178.5,232.5 175.75,232.5 175.75,231 177.5,231 177.5,230.25
NetC42_PHY_4_1 on Bottom Layer "NETC42_PHY_4_1_L06_P198" (solid, remove dead copper, pour order 198): 179.5,230.25 179.5,229 175.75,229 175.75,231 177.5,231 177.5,230.25
8870_1V1 on Bottom Layer "8870_1V1_L06_P192" (solid, remove dead copper, pour order 192): 179.5,226.75 179.5,225.5 177.5,225.5 177.5,227.5 178.5,227.5 178.5,226.75
NetC36_PHY_4_1 on Bottom Layer "NETC36_PHY_4_1_L06_P186" (solid, remove dead copper, pour order 186): 175.75,227.5 178.5,227.5 178.5,226.75 179.5,226.75 179.5,229 175.75,229
3V3 on Bottom Layer "3V3_L06_P180" (solid, remove dead copper, pour order 180): 182.25,225.5 182.25,223.5 180,223.5 180,224.25 181,225.25 181,225.5
8870_1V1 on Bottom Layer "8870_1V1_L06_P174" (solid, remove dead copper, pour order 174): 183.5,225.5 183.5,223.5 182.25,223.5 182.25,225.5
3V3 on Bottom Layer "3V3_L06_P168" (solid, remove dead copper, pour order 168): 184.5,223.5 184.5,225.5 183.5,225.5 183.5,223.5
8870_1V1 on Bottom Layer "8870_1V1_L06_P162" (solid, remove dead copper, pour order 162): 187,225.5 187,223.5 184.5,223.5 184.5,225.5
8870_1V1 on Bottom Layer "8870_1V1_L06_P156" (solid, remove dead copper, pour order 156): 186.5,229 188.5,229 188.5,226.75 186.5,226.75
3V3 on Bottom Layer "3V3_L06_P150" (solid, remove dead copper, pour order 150): 186.5,231.5 187,231.5 187,232.25 188.5,232.25 188.5,229.25 186.5,229.25
3V3 on Bottom Layer "3V3_L06_P150" (solid, remove dead copper, pour order 150): 206.5,231.5 207,231.5 207,232.25 208.5,232.25 208.5,229.25 206.5,229.25
3V3 on Bottom Layer "3V3_L06_P151" (solid, remove dead copper, pour order 151): 226.5,231.5 227,231.5 227,232.25 228.5,232.25 228.5,229.25 226.5,229.25
8870_1V1 on Bottom Layer "8870_1V1_L06_P156" (solid, remove dead copper, pour order 156): 206.5,229 208.5,229 208.5,226.75 206.5,226.75
8870_1V1 on Bottom Layer "8870_1V1_L06_P157" (solid, remove dead copper, pour order 157): 226.5,229 228.5,229 228.5,226.75 226.5,226.75
8870_1V1 on Bottom Layer "8870_1V1_L06_P162" (solid, remove dead copper, pour order 162): 207,225.5 207,223.5 204.5,223.5 204.5,225.5
8870_1V1 on Bottom Layer "8870_1V1_L06_P163" (solid, remove dead copper, pour order 163): 227,225.5 227,223.5 224.5,223.5 224.5,225.5
3V3 on Bottom Layer "3V3_L06_P168" (solid, remove dead copper, pour order 168): 204.5,223.5 204.5,225.5 203.5,225.5 203.5,223.5
3V3 on Bottom Layer "3V3_L06_P169" (solid, remove dead copper, pour order 169): 224.5,223.5 224.5,225.5 223.5,225.5 223.5,223.5
8870_1V1 on Bottom Layer "8870_1V1_L06_P174" (solid, remove dead copper, pour order 174): 203.5,225.5 203.5,223.5 202.25,223.5 202.25,225.5
8870_1V1 on Bottom Layer "8870_1V1_L06_P175" (solid, remove dead copper, pour order 175): 223.5,225.5 223.5,223.5 222.25,223.5 222.25,225.5
3V3 on Bottom Layer "3V3_L06_P180" (solid, remove dead copper, pour order 180): 202.25,225.5 202.25,223.5 200,223.5 200,224.25 201,225.25 201,225.5
3V3 on Bottom Layer "3V3_L06_P181" (solid, remove dead copper, pour order 181): 222.25,225.5 222.25,223.5 220,223.5 220,224.25 221,225.25 221,225.5
NetC36_PHY_3_1 on Bottom Layer "NETC36_PHY_3_1_L06_P186" (solid, remove dead copper, pour order 186): 195.75,227.5 198.5,227.5 198.5,226.75 199.5,226.75 199.5,229 195.75,229
NetC36_PHY_2_1 on Bottom Layer "NETC36_PHY_2_1_L06_P187" (solid, remove dead copper, pour order 187): 215.75,227.5 218.5,227.5 218.5,226.75 219.5,226.75 219.5,229 215.75,229
8870_1V1 on Bottom Layer "8870_1V1_L06_P192" (solid, remove dead copper, pour order 192): 199.5,226.75 199.5,225.5 197.5,225.5 197.5,227.5 198.5,227.5 198.5,226.75
8870_1V1 on Bottom Layer "8870_1V1_L06_P193" (solid, remove dead copper, pour order 193): 219.5,226.75 219.5,225.5 217.5,225.5 217.5,227.5 218.5,227.5 218.5,226.75
NetC42_PHY_3_1 on Bottom Layer "NETC42_PHY_3_1_L06_P198" (solid, remove dead copper, pour order 198): 199.5,230.25 199.5,229 195.75,229 195.75,231 197.5,231 197.5,230.25
NetC42_PHY_2_1 on Bottom Layer "NETC42_PHY_2_1_L06_P199" (solid, remove dead copper, pour order 199): 219.5,230.25 219.5,229 215.75,229 215.75,231 217.5,231 217.5,230.25
LAN8870_VBAT_PHY_3 on Bottom Layer "LAN8870_VBAT_PHY_3_L06_P204" (solid, remove dead copper, pour order 204): 199.5,230.25 199.5,231.5 198.5,231.5 198.5,232.5 195.75,232.5 195.75,231 197.5,231 197.5,230.25
LAN8870_VBAT_PHY_2 on Bottom Layer "LAN8870_VBAT_PHY_2_L06_P205" (solid, remove dead copper, pour order 205): 219.5,230.25 219.5,231.5 218.5,231.5 218.5,232.5 215.75,232.5 215.75,231 217.5,231 217.5,230.25
LAN8870_VDDA_PHY_3 on Bottom Layer "LAN8870_VDDA_PHY_3_L06_P210" (solid, remove dead copper, pour order 210): 200,234.5 199.5,234.5 198.5,233.5 198.5,232.5 199.75,232.5 199.75,233.5 200,233.75
LAN8870_VDDA_PHY_2 on Bottom Layer "LAN8870_VDDA_PHY_2_L06_P211" (solid, remove dead copper, pour order 211): 220,234.5 219.5,234.5 218.5,233.5 218.5,232.5 219.75,232.5 219.75,233.5 220,233.75
NetC42_PHY_3_1 on Bottom Layer "NETC42_PHY_3_1_L06_P216" (solid, remove dead copper, pour order 216): 199.75,232.5 200.75,232.5 200.75,233.5 201,233.75 201,234.5 200,234.5 200,233.75 199.75,233.5
NetC42_PHY_2_1 on Bottom Layer "NETC42_PHY_2_1_L06_P217" (solid, remove dead copper, pour order 217): 219.75,232.5 220.75,232.5 220.75,233.5 221,233.75 221,234.5 220,234.5 220,233.75 219.75,233.5
LAN8870_VDDA_PHY_3 on Bottom Layer "LAN8870_VDDA_PHY_3_L06_P222" (solid, remove dead copper, pour order 222): 201,233.75 200.75,233.5 200.75,232.5 202,232.5 202,234.5 201,234.5
LAN8870_VDDA_PHY_2 on Bottom Layer "LAN8870_VDDA_PHY_2_L06_P223" (solid, remove dead copper, pour order 223): 221,233.75 220.75,233.5 220.75,232.5 222,232.5 222,234.5 221,234.5
NetC42_PHY_3_1 on Bottom Layer "NETC42_PHY_3_1_L06_P228" (solid, remove dead copper, pour order 228): 202,232.5 203.25,232.5 203.25,234.5 202,234.5
NetC42_PHY_2_1 on Bottom Layer "NETC42_PHY_2_1_L06_P229" (solid, remove dead copper, pour order 229): 222,232.5 223.25,232.5 223.25,234.5 222,234.5
LAN8870_VDDA_PHY_3 on Bottom Layer "LAN8870_VDDA_PHY_3_L06_P234" (solid, remove dead copper, pour order 234): 203.25,232.5 204.5,232.5 204.5,234.5 203.25,234.5
LAN8870_VDDA_PHY_2 on Bottom Layer "LAN8870_VDDA_PHY_2_L06_P235" (solid, remove dead copper, pour order 235): 223.25,232.5 224.5,232.5 224.5,234.5 223.25,234.5
LAN8870_VDDA_PHY_3 on Bottom Layer "LAN8870_VDDA_PHY_3_L06_P240" (solid, remove dead copper, pour order 240): 204.5,232.5 207,232.5 207,235.25 204.5,235.25
LAN8870_VDDA_PHY_2 on Bottom Layer "LAN8870_VDDA_PHY_2_L06_P241" (solid, remove dead copper, pour order 241): 224.5,232.5 227,232.5 227,235.25 224.5,235.25
3V3 on Bottom Layer "3V3_L06_P147" (solid, remove dead copper, pour order 147): 185.5,246.5 185.5,246 186.25,246 186.25,244.5 183.25,244.5 183.25,246.5
8870_1V1 on Bottom Layer "8870_1V1_L06_P153" (solid, remove dead copper, pour order 153): 183,246.5 183,244.5 180.75,244.5 180.75,246.5
8870_1V1 on Bottom Layer "8870_1V1_L06_P159" (solid, remove dead copper, pour order 159): 179.5,246 177.5,246 177.5,248.5 179.5,248.5
3V3 on Bottom Layer "3V3_L06_P165" (solid, remove dead copper, pour order 165): 177.5,248.5 179.5,248.5 179.5,249.5 177.5,249.5
8870_1V1 on Bottom Layer "8870_1V1_L06_P171" (solid, remove dead copper, pour order 171): 179.5,249.5 177.5,249.5 177.5,250.75 179.5,250.75
3V3 on Bottom Layer "3V3_L06_P177" (solid, remove dead copper, pour order 177): 179.5,250.75 177.5,250.75 177.5,253 178.25,253 179.25,252 179.5,252
NetC36_PHY_5_1 on Bottom Layer "NETC36_PHY_5_1_L06_P183" (solid, remove dead copper, pour order 183): 181.5,257.25 181.5,254.5 180.75,254.5 180.75,253.5 183,253.5 183,257.25
8870_1V1 on Bottom Layer "8870_1V1_L06_P189" (solid, remove dead copper, pour order 189): 180.75,253.5 179.5,253.5 179.5,255.5 181.5,255.5 181.5,254.5 180.75,254.5
NetC42_PHY_5_1 on Bottom Layer "NETC42_PHY_5_1_L06_P195" (solid, remove dead copper, pour order 195): 184.25,253.5 183,253.5 183,257.25 185,257.25 185,255.5 184.25,255.5
LAN8870_VBAT_PHY_5 on Bottom Layer "LAN8870_VBAT_PHY_5_L06_P201" (solid, remove dead copper, pour order 201): 184.25,253.5 185.5,253.5 185.5,254.5 186.5,254.5 186.5,257.25 185,257.25 185,255.5 184.25,255.5
LAN8870_VDDA_PHY_5 on Bottom Layer "LAN8870_VDDA_PHY_5_L06_P207" (solid, remove dead copper, pour order 207): 188.5,253 188.5,253.5 187.5,254.5 186.5,254.5 186.5,253.25 187.5,253.25 187.75,253
NetC42_PHY_5_1 on Bottom Layer "NETC42_PHY_5_1_L06_P213" (solid, remove dead copper, pour order 213): 186.5,253.25 186.5,252.25 187.5,252.25 187.75,252 188.5,252 188.5,253 187.75,253 187.5,253.25
LAN8870_VDDA_PHY_5 on Bottom Layer "LAN8870_VDDA_PHY_5_L06_P219" (solid, remove dead copper, pour order 219): 187.75,252 187.5,252.25 186.5,252.25 186.5,251 188.5,251 188.5,252
NetC42_PHY_5_1 on Bottom Layer "NETC42_PHY_5_1_L06_P225" (solid, remove dead copper, pour order 225): 186.5,251 186.5,249.75 188.5,249.75 188.5,251
LAN8870_VDDA_PHY_5 on Bottom Layer "LAN8870_VDDA_PHY_5_L06_P231" (solid, remove dead copper, pour order 231): 186.5,249.75 186.5,248.5 188.5,248.5 188.5,249.75
LAN8870_VDDA_PHY_5 on Bottom Layer "LAN8870_VDDA_PHY_5_L06_P237" (solid, remove dead copper, pour order 237): 186.5,248.5 186.5,246 189.25,246 189.25,248.5

## Text inside footprints (layer, text, board x,y; h text height)
J2: Mechanical 13 "PCB edge" at 251.139,47.451 h1.27
U8_TCAN1146_0: Mechanical 13 "*" at 690.201,295.01 h1.27 r90; Top Overlay "*" at 689.323,293.886 h1.27 r90
U8_TCAN1146_1: Mechanical 13 "*" at 683.201,307.01 h1.27 r90; Top Overlay "*" at 682.323,305.886 h1.27 r90